# Altium PCB lab11.PcbDoc
Units mil, origin at the board's own origin, x right, y up, seen from the top; angles counter-clockwise.
Board outline 6300 x 5200 mil, 2 copper layers (Top Layer, Top, Bottom Layer, Bottom); 21 components, 14 nets, 48 pads, 0 vias.
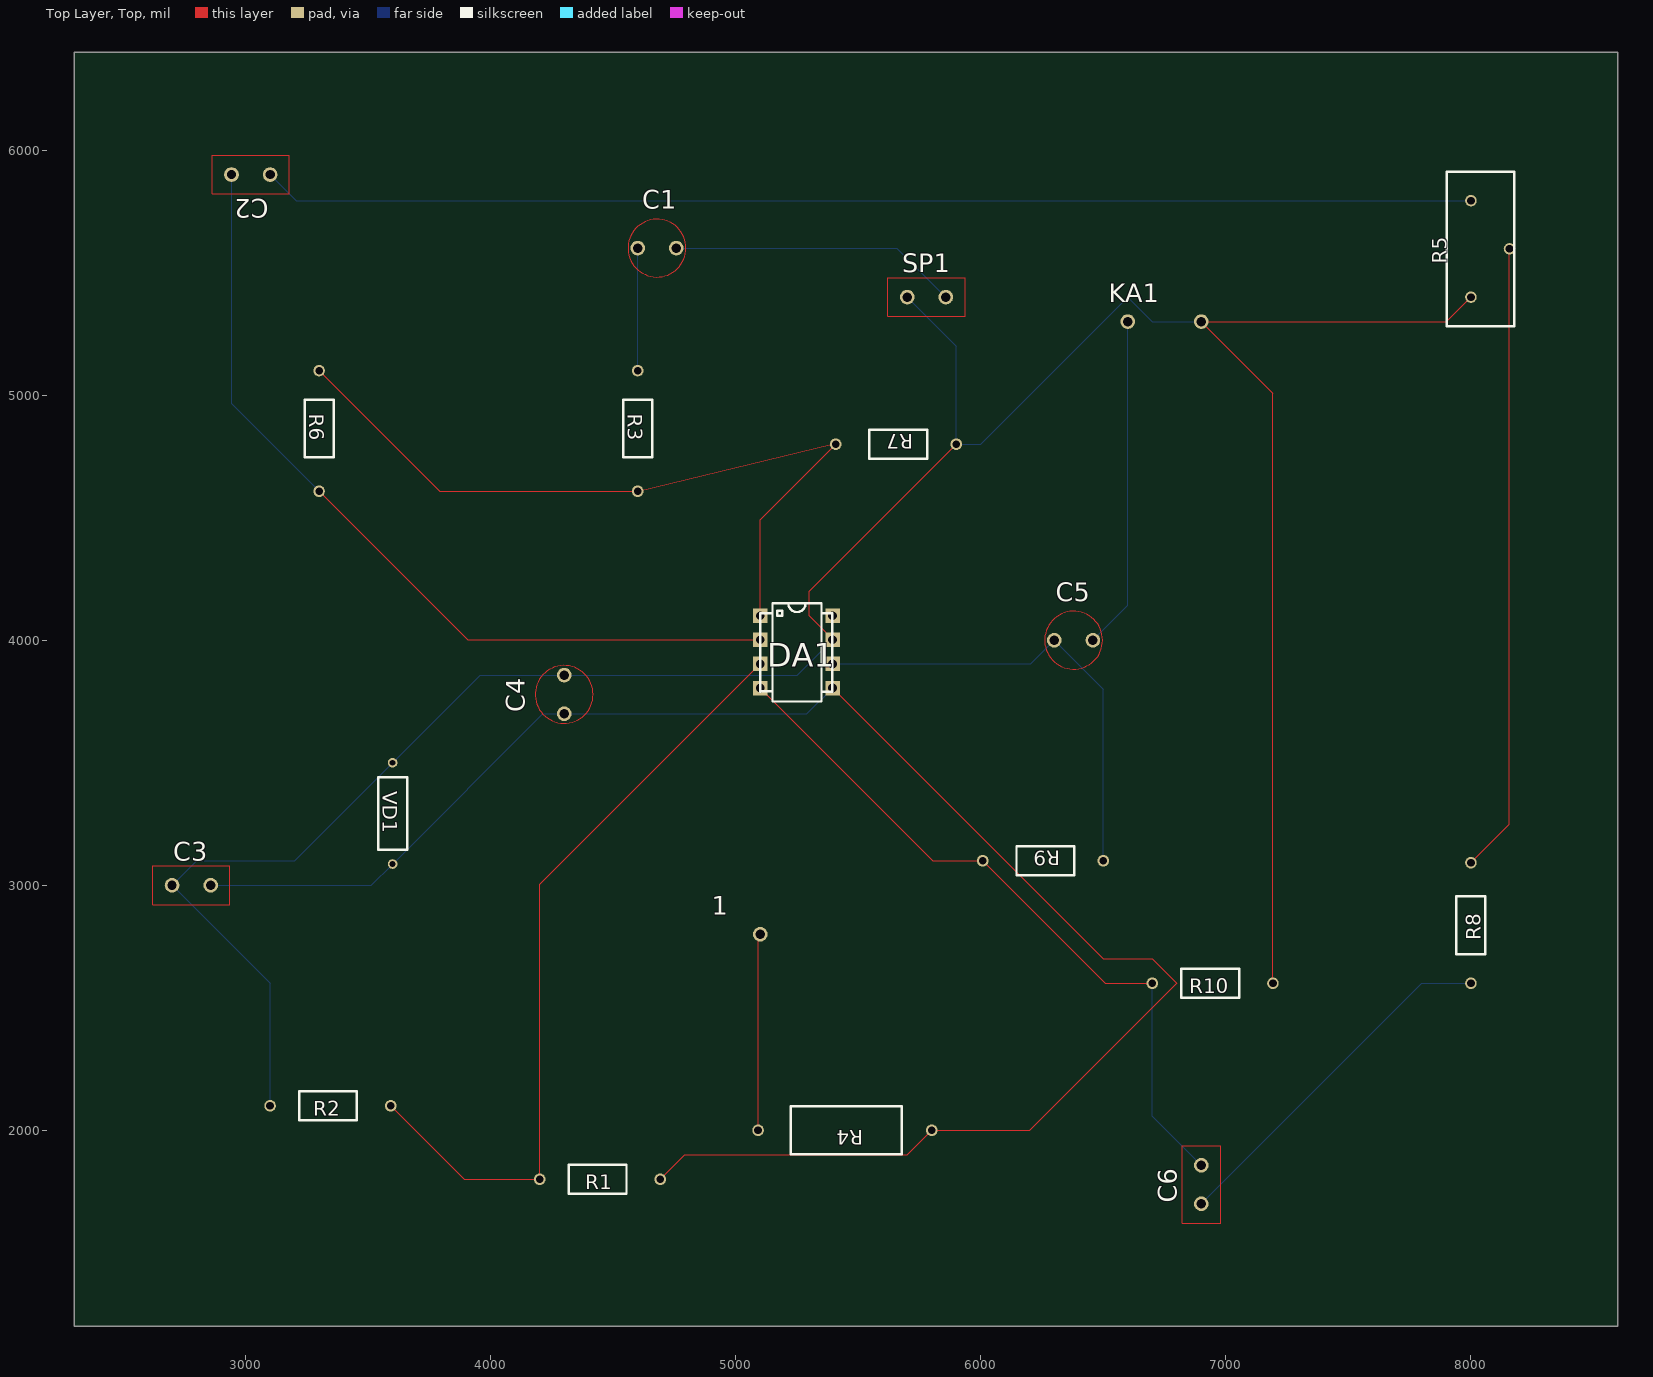
[diagram p0: Top Layer, Top view]
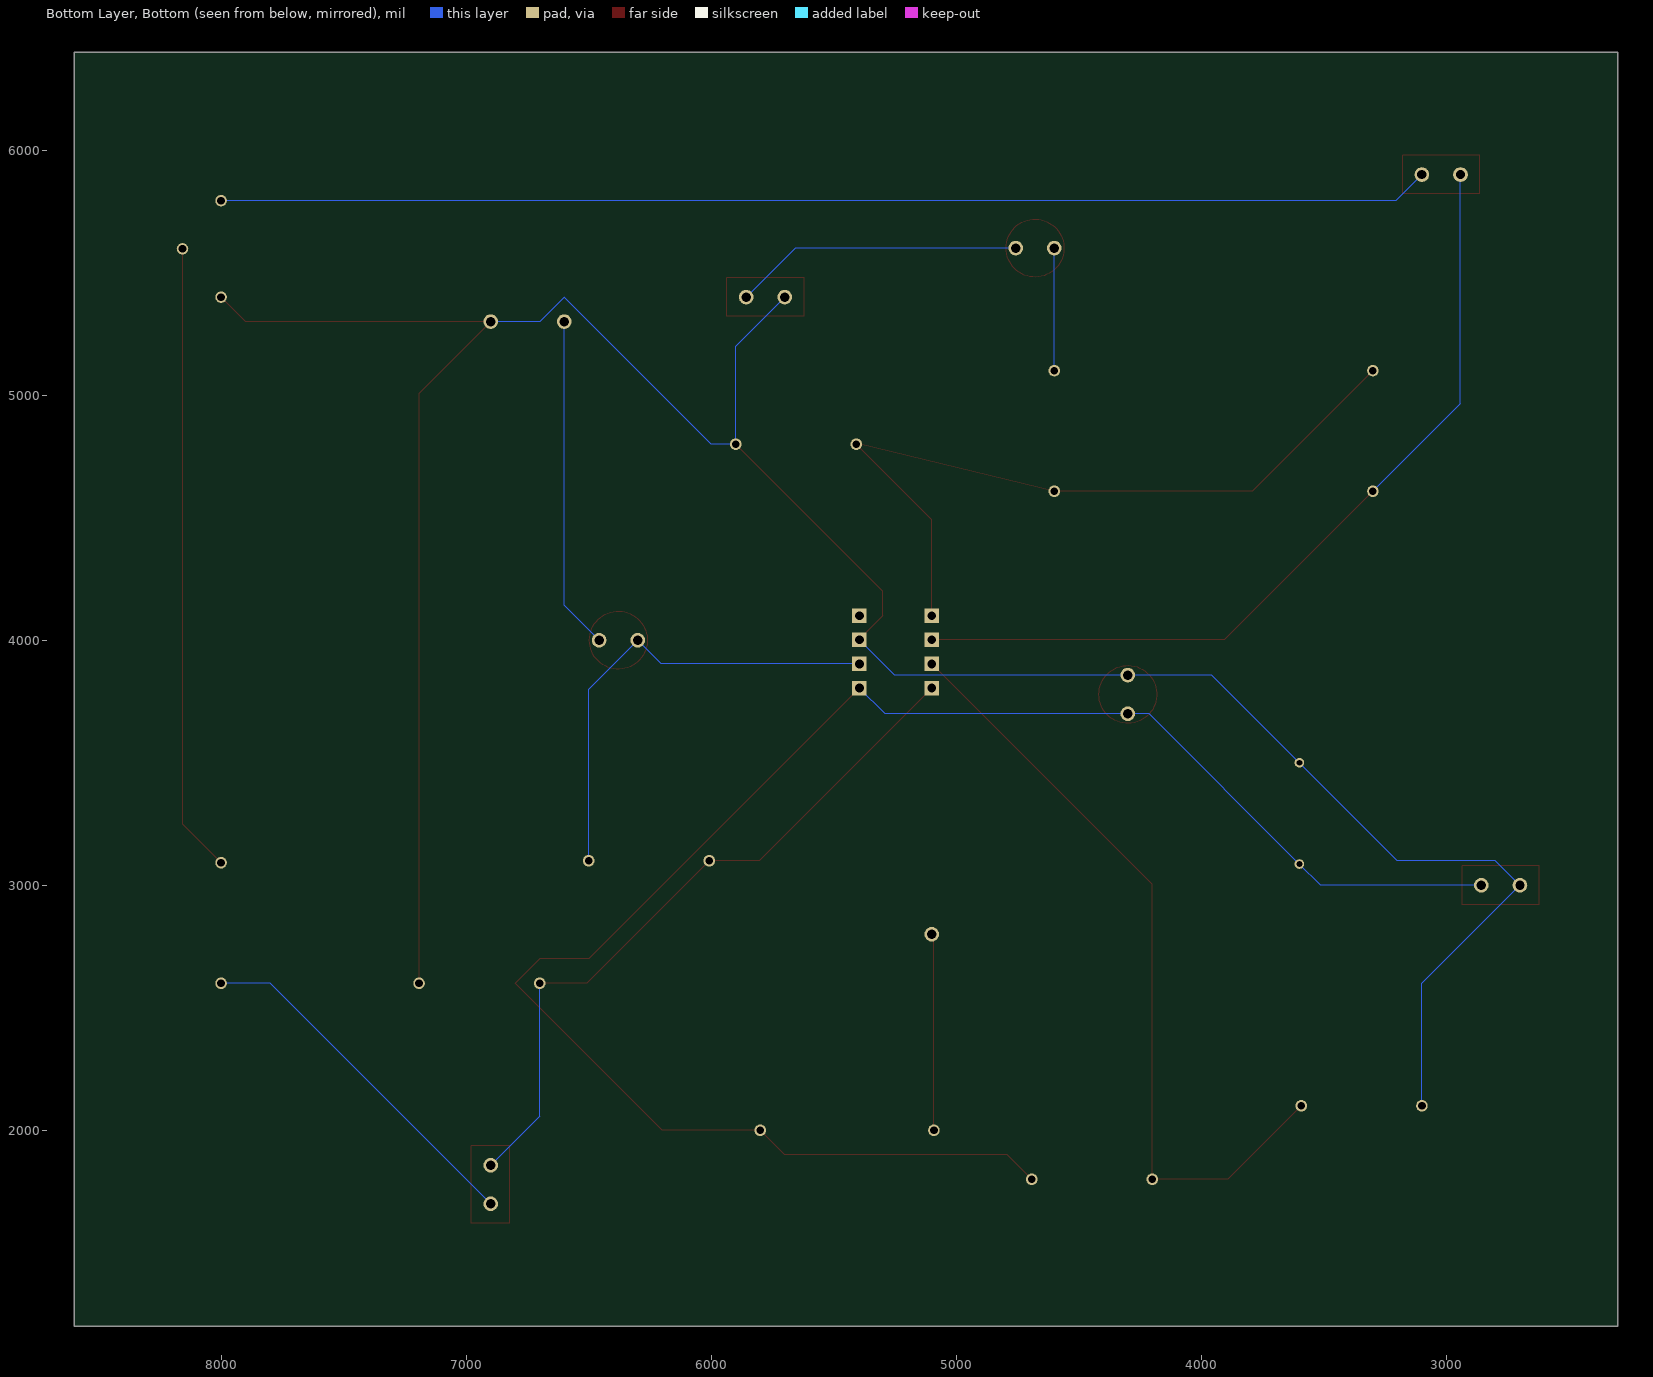
[diagram p1: Bottom Layer, Bottom view, seen from below]

## Layer stack, top to bottom
Top Solder, Top Mask: solder mask 0.4, Solder Resist, Dk 3.5
Top Layer, Top: signal copper 1.4
Dielectric 1: dielectric 12.6, FR-4, Dk 4.8
Bottom Layer, Bottom: signal copper 1.4
Bottom Solder, Bot Mask: solder mask 0.4, Solder Resist, Dk 3.5

## Board outline
2300,1200 8600,1200 8600,6400 2300,6400

## Design rules (kind name [scope] priority, off if disabled: settings)
Clearance [All] p1: gap=10 ignorepadtopadclearanceinfootprint=FALSE except(0: Arc-Hole Track-Hole SMDPad-Hole THPad-Hole Via-Hole Fill-Hole Poly-Hole Region-Hole Text-Hole; 11.81: Arc-Arc Arc-Track Arc-THPad Arc-Via Track-Track Track-THPad Track-Via THPad-THPad THPad-Via Via-Via)
PlaneClearance [All] p1: clearance=10
PolygonConnect [All] p1: connectstyle=Relief reliefconductorwidth=10 reliefentries=4 polygonreliefangle="90 Angle" airgapwidth=10
RoomDefinition [All] p1: confinementstyle=ConfineIn formatcopy=TRUE lockcomponents=FALSE outline 2300,1200 8600,1200 8600,6400 2300,6400
RoutingVias [All] p1: holewidth=28 width=50 viastyle="Through Hole" minholewidth=28 minwidth=50 maxholewidth=28 maxwidth=50
SolderMaskExpansion [All] p1: expansion=4 istentingtop=FALSE
Width [All] p1: maxlimit=10 minlimit=10 preferedwidth=10
29 further rules are at their usual default settings.

## Components (designator, comment, footprint, x,y, rotation, side; value= is the part's Value field where it differs from the comment)
1 "Un=+5B" 1PAD 5100,2800 r0 top
C1 "1mk 6,3B" CAP2 4600,5600 r0 top
C2 "0,05mk" CAP1 3100,5900 r180 top
C3 "0,1mk" CAP1 2700,3000 r0 top
C4 "500mk 16B" CAP2 4300,3700 r90 top
C5 "10mk 16B" CAP2 6300,4000 r0 top
C6 "0,02mk" CAP1 6900,1700 r90 top
DA1 "" DIP8_DIP8(Primary) 5100,4100 r0 top
KA1 "{Value}" 2PAD_CON2(Primary) 6600,5300 r0 top
R1 "4,7M" МЛТ(0.125) 4200,1800 r0 top
R2 "4,7M" МЛТ(0.125) 3100,2100 r0 top
R3 "10k" МЛТ(0.125) 4600,5100 r270 top
R4 "82" МЛТ(0.5) 5800,2000 r180 top
R5 "100k" СП3-38В 8000,5400 r90 top
R6 "1M" МЛТ(0.125) 3300,5100 r270 top
R7 "2M" МЛТ(0.125) 5900,4800 r180 top
R8 "330k" МЛТ(0.125) 8000,2600 r90 top
R9 "2,2M" МЛТ(0.125) 6500,3100 r180 top
R10 "1M" МЛТ(0.125) 6700,2600 r0 top
SP1 "" CAP1 5700,5400 r0 top
VD1 "{Value}" KC133A 3600,3500 r270 top

## Footprints (in the part's own frame and the unit in brackets; to place one, negate y for a bottom-side part, rotate by r counter-clockwise, add the part's x,y. Pads: shape width x height; smd on the part's side, far side on the other; paste and mask are expansions set on the pad)
1PAD [mil]
  round 60 hole 38: 1(0,0)
2PAD_CON2(Primary) [mil]
  round 60 hole 38: 1(300,0) 2(0,0)
CAP1 [mil]
  round 60 hole 38: 1(0,0) 2(157.48,0)
  Top Layer, Top lines w3.94: 236.22,78.74 -78.74,78.74 -78.74,-78.74 236.22,-78.74 236.22,78.74
CAP2 [mil]
  round 60 hole 38: 1(0,0) 2(157.48,0)
  Top Layer, Top circle w3.94: c78.74,0 r118.11
DIP8_DIP8(Primary) [mm]
  rect 1.5x1.5 hole 0.9: 1(0,-5) 2(0,0) 3(0,-2.5) 4(7.5,-7.5) 5(7.5,-5) 6(7.5,-2.5) 7(0,-7.5) PWR(7.5,0)
  silkscreen extent 0,-8.89 7.47,1.27
KC133A [mm]
  round 1 hole 0.6: 1(0,0) 2(10.5,0)
  silkscreen extent 1.5,-1.5 9,1.5
МЛТ(0.5) [mm]
  round 1.2 hole 0.8: 1(0,0) 2(18,0)
  silkscreen extent 3.12,-2.5 14.62,2.5
МЛТ(0.125) [mm]
  round 1.2 hole 0.8: 1(0,0) 2(12.5,0)
  silkscreen extent 3,-1.5 9,1.5
СП3-38В [mm]
  round 1.2 hole 0.8: 1(0,0) 2(10,0) 3(5,-4)
  silkscreen extent -3,-4.5 13,2.5

## Nets (pads, with @x,y where several pads share a name; then routed paths per layer and width w, separated by ;. In a path a pad name is that pad's centre, name@x,y a point inside that pad or via, vN(x,y) a via of type N, cw(c..) or ccw(c..) an arc to the next point about the centre after c; other vN are vias at no path point)
1: C3.1 C4.2 DA1.6 KA1.1 R2.1 R5.1 R7.1 R10.2 SP1.1 VD1.1 | length 11197.5
  Top Layer, Top w3.94: DA1.6 5395.28,4004.72 5300,4100 5300,4200 R7.1 ; R10.2 7192.13,5007.87 KA1.1 7900,5300 R5.1
  Bottom Layer, Bottom w3.94: R2.1 3100,2600 C3.1 2800,3100 3200,3100 VD1.1 3957.48,3857.48 C4.2 5251.18,3857.48 DA1.6 ; SP1.1 5900,5200 R7.1 6000,4800 6600,5400 6700,5300 KA1.1
NET00000: DA1.1 R1.1 R2.2 | length 3208.1
  Top Layer, Top w3.94: R2.2 3892.13,1800 R1.1 4200,3003.15 DA1.1
NET00002: C1.1 R3.1 | length 500
  Bottom Layer, Bottom w3.94: R3.1 C1.1
NET00003: C1.2 SP1.2 | length 1182.8
  Bottom Layer, Bottom w3.94: C1.2 5657.48,5600 SP1.2
NET00004: C2.2 DA1.3 R6.2 | length 3491.3
  Top Layer, Top w3.94: R6.2 3906.3,4001.57 DA1.3
  Bottom Layer, Bottom w3.94: C2.2 2942.52,4965.35 R6.2
NET00005: C3.2 C4.1 DA1.4 R1.2 R4.1 VD1.2 | length 7214.1
  Top Layer, Top w3.94: R1.2 4792.13,1900 5700,1900 R4.1 6200,2000 6800,2600 6700,2700 6500,2700 DA1.4
  Bottom Layer, Bottom w3.94: C3.2 3513.39,3000 VD1.2 4213.39,3700 C4.1 5290.55,3700 DA1.4
NET00007: C2.1 R5.2 | length 4944
  Bottom Layer, Bottom w3.94: C2.1 3206.3,5793.7 R5.2
NET00008: DA1.2 R3.2 R6.1 R7.2 | length 3162.2
  Top Layer, Top w3.94: R6.1 3792.13,4607.87 R3.2 5392.13,4800 R7.2 5100,4492.13 DA1.2
NET00009: R5.3 R8.2 | length 2570
  Top Layer, Top w3.94: R8.2 8157.48,3249.61 R5.3
NET00010: C6.1 R8.1 | length 1472.8
  Bottom Layer, Bottom w3.94: C6.1 7800,2600 R8.1
NET00011: C5.1 DA1.5 R9.1 | length 1927.7
  Bottom Layer, Bottom w3.94: DA1.5 6203.15,3903.15 C5.1 6500,3800 R9.1
NET00012: C6.2 DA1.7 R9.2 R10.1 | length 2924.4
  Top Layer, Top w3.94: DA1.7 5804.72,3100 R9.2 6507.87,2600 R10.1
  Bottom Layer, Bottom w3.94: R10.1 6700,2057.48 C6.2
NET00013: C5.2 KA1.2 | length 1359
  Bottom Layer, Bottom w3.94: C5.2 6600,4142.52 KA1.2
NET00014: 1.1 R4.2 | length 803.6
  Top Layer, Top w3.94: R4.2 5091.34,2791.34 1.1
pads on no net: DA1.PWR